# Altium PCB PCB1.PcbDoc
Units mm, origin at the board's own origin, x right, y up, seen from the top; angles counter-clockwise.
Board outline 89 x 51 mm, 2 copper layers (Top Layer, Bottom Layer); 26 components, 19 nets, 82 pads, 16 vias.
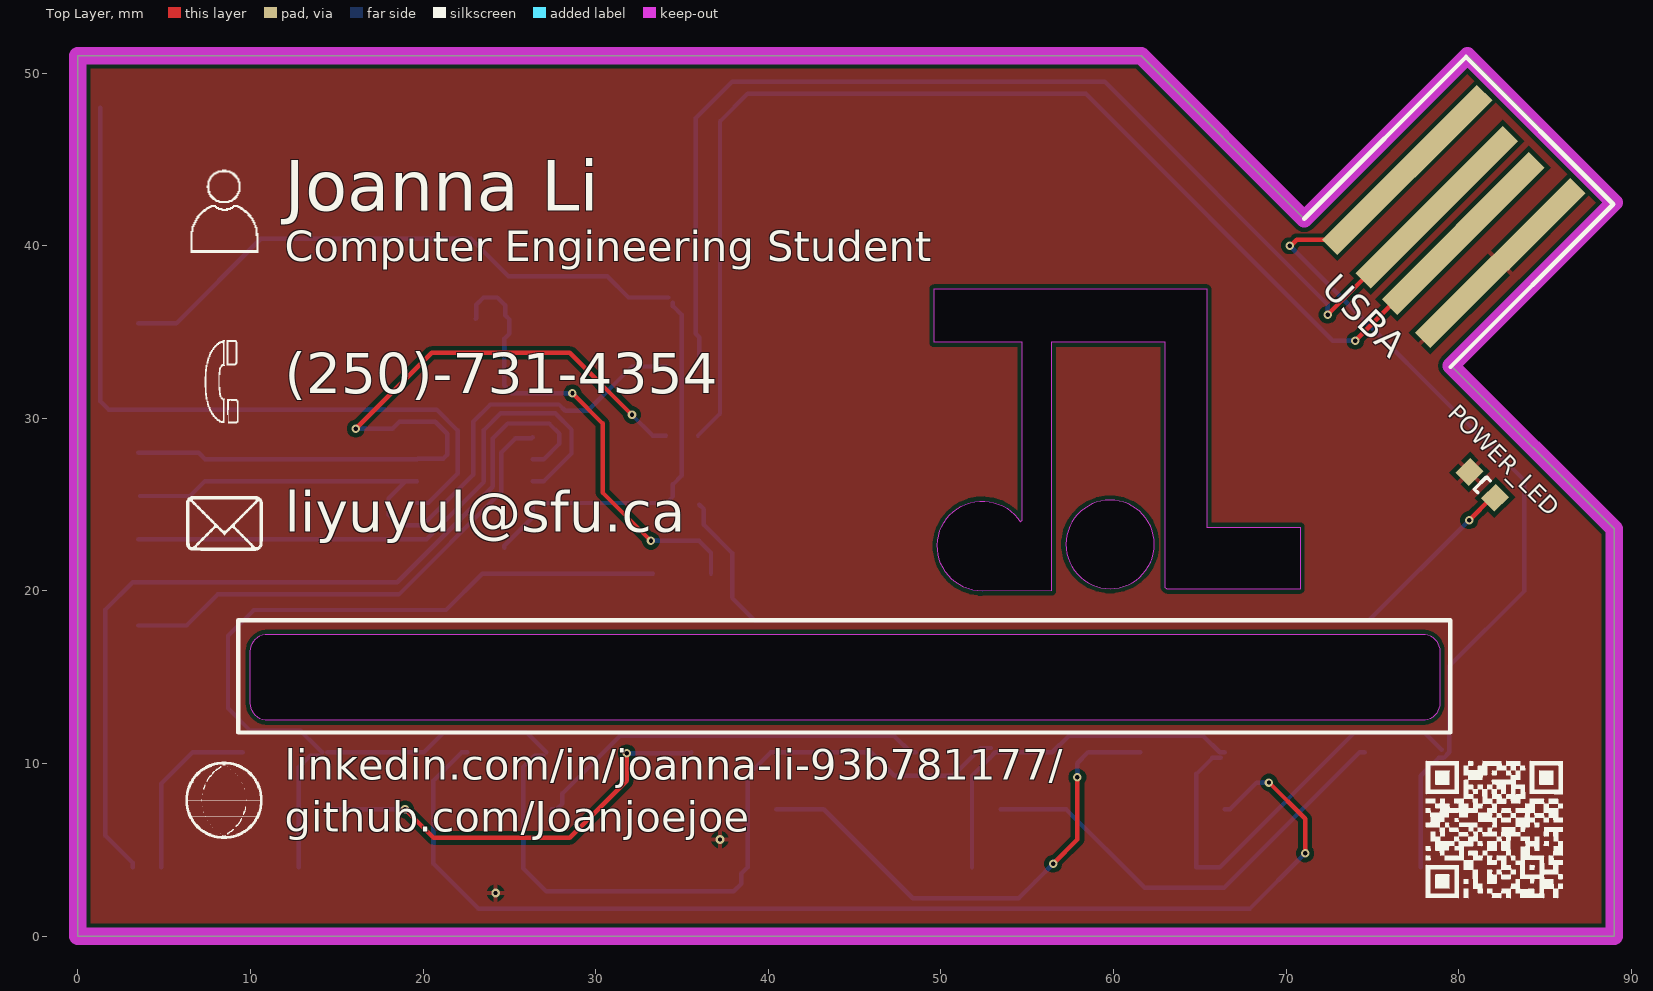
[diagram p0: Top Layer view]
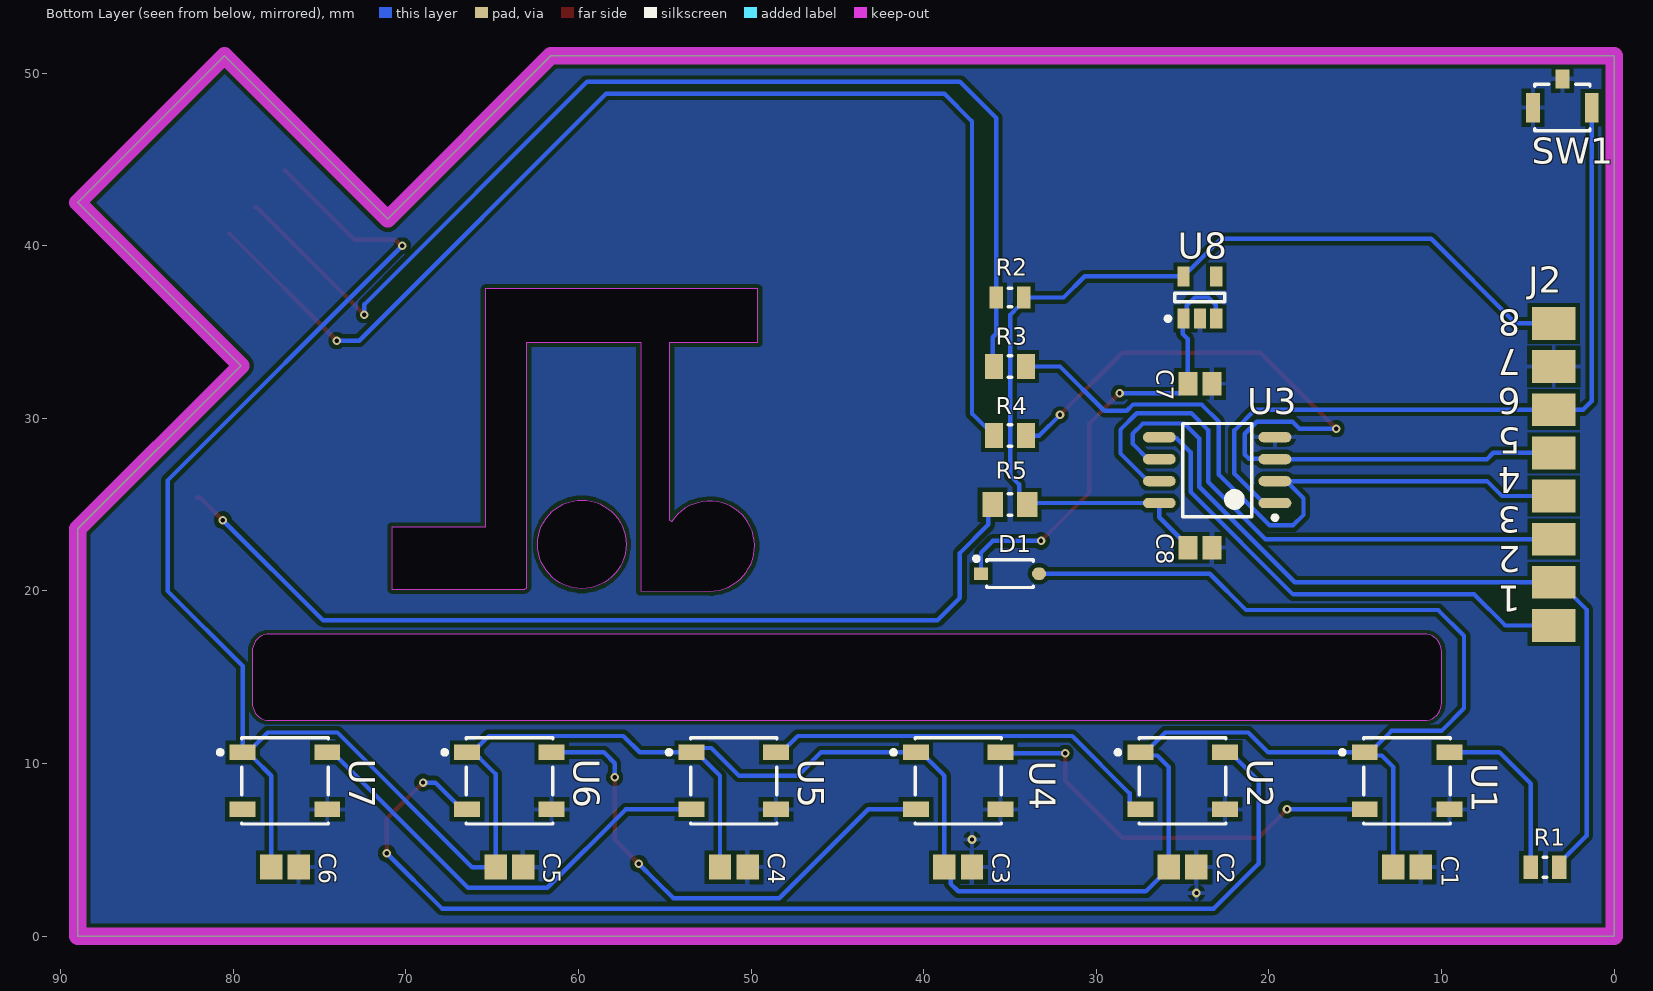
[diagram p1: Bottom Layer view, seen from below]

## Layer stack, top to bottom
Top Solder: solder mask 0.0102, Solder Resist, Dk 3.5
Top Layer: signal copper 0.0356
Dielectric 1: dielectric 0.32, FR-4, Dk 4.8
Bottom Layer: signal copper 0.0356
Bottom Solder: solder mask 0.0102, Solder Resist, Dk 3.5

## Board outline
0,0 89,0 89,23.6 79.55,33.05 89,42.5 80.5,51 71.05,41.55 61.6,51 0,51
cut-out: 57.239,22.7 ccw(c59.8,22.7) 59.8,20.139 ccw(c59.8,22.7) 62.361,22.7 ccw(c59.8,22.7) 59.8,25.261 ccw(c59.8,22.7)
cut-out: 54.6,24 54.7,24.1 54.7,34.4 49.6,34.4 49.6,37.5 65.4,37.5 65.4,23.7 70.8,23.7 70.8,20.1 63.1,20.1 63,20.2 63,34.4 56.4,34.4 56.4,20 52.4,19.992 cw(c52.4,22.6)
cut-out: 11,12.5 cw(c11,13.5) 10,13.5 10,16.5 cw(c11,16.5) 11,17.5 77.9,17.5 cw(c77.9,16.5) 78.9,16.5 78.9,13.5 cw(c77.9,13.5) 77.9,12.5

## Design rules (kind name [scope] priority, off if disabled: settings)
Clearance Clearance_1 [All] p1: gap=0.254 ignorepadtopadclearanceinfootprint=FALSE except(0: Arc-Hole Track-Hole SMDPad-Hole THPad-Hole Via-Hole Fill-Hole Poly-Hole Region-Hole Text-Hole; 0.15: SMDPad-SMDPad)
Clearance [All] p2: gap=0.254 ignorepadtopadclearanceinfootprint=FALSE except(0: Arc-Hole Track-Hole SMDPad-Hole THPad-Hole Via-Hole Fill-Hole Poly-Hole Region-Hole Text-Hole)
PolygonConnect [All] p1: connectstyle=Relief reliefconductorwidth=0.254 reliefentries=4 polygonreliefangle="90 Angle" airgapwidth=0.254
RoutingVias [All] p1: holewidth=0.711 width=1.27 viastyle="Through Hole" minholewidth=0.711 minwidth=1.27 maxholewidth=0.711 maxwidth=1.27
SolderMaskExpansion [All] p1: expansion=0.102 istentingtop=FALSE
Width [All] p1: maxlimit=0.254 minlimit=0.254 preferedwidth=0.254
30 further rules are at their usual default settings.

## Components (designator, comment, footprint, x,y, rotation, side; value= is the part's Value field where it differs from the comment)
C1 "0.1uf 10% 0805 16V" CAPC2013X140X50NL20T25 12,4 r0 bottom
C2 "0.1uf 10% 0805 16V" CAPC2013X140X50NL20T25 25,4 r0 bottom
C3 "0.1uf 10% 0805 16V" CAPC2013X140X50NL20T25 38,4 r0 bottom
C4 "0.1uf 10% 0805 16V" CAPC2013X140X50NL20T25 51,4 r0 bottom
C5 "0.1uf 10% 0805 16V" CAPC2013X140X50NL20T25 64,4 r0 bottom
C6 "0.1uf 10% 0805 16V" CAPC2013X140X50NL20T25 77,4 r0 bottom
C7 "10uf 16V 0805 10%" CAPC2013X145X50LL20T25 24,32 r0 bottom
C8 "10uf 16V 0805 10%" CAPC2013X145X50LL20T25 24,22.5 r0 bottom
D1 "MBR0520LT1G" FP-425-04-IPC_C 35,21 r180 bottom
J2 "pinpad" open_pad_8 3.5,25.5 r90 bottom
POWER_LED "CLEAR POWER" 0805_A 81.358,26.142 r315 top (schematic designator LED1)
R1 "470 1% 0805" RESC2013X50X30LL20T20 4,4 r0 bottom
R2 "1.5k 0805 1%" RESC2013X60X35LL10T20 35,37 r180 bottom
R3 "66.5 1% 0805" RESC2013X50X30NL20T20 35,33 r180 bottom
R4 "66.5 1% 0805" RESC2013X50X30NL20T20 35,29 r180 bottom
R5 "1K 0805 1%" RESC2013X60X35ML10T20 35,25 r0 bottom
SW1 "B3U-1100PM" FP-B3U-1100PM-MFG 3,48 r0 bottom
U1 "1655" ADA-RGB-1655_V 12,9 r180 bottom
U2 "1655" ADA-RGB-1655_V 25,9 r180 bottom
U3 "ATtiny85-20SUR" 8S2_L 23,27 r0 bottom
U4 "1655" ADA-RGB-1655_V 38,9 r180 bottom
U5 "1655" ADA-RGB-1655_V 51,9 r180 bottom
U6 "1655" ADA-RGB-1655_V 64,9 r180 bottom
U7 "1655" ADA-RGB-1655_V 77,9 r180 bottom
U8 "ADP150AUJZ-3.3-R7" ADI-UJ-5_M 24,37 r90 bottom
USBA "USB 12MM" "USB A" 75.306,37.294 r315 top (schematic designator J1)

## Footprints (in the part's own frame and the unit in brackets; to place one, negate y for a bottom-side part, rotate by r counter-clockwise, add the part's x,y. Pads: shape width x height; smd on the part's side, far side on the other; paste and mask are expansions set on the pad)
8S2_L [mm] "SOP, 8-Leads, Body 5.3x5.3mm, Pitch 1.27mm, IPC High Density"
  oval 1.9x0.6 smd: 1(-3.35,1.905) 2(-3.35,0.635) 3(-3.35,-0.635) 4(-3.35,-1.905) 5(3.35,-1.905) 6(3.35,-0.635) 7(3.35,0.635) 8(3.35,1.905)
  silkscreen extent -3.47,-2.7 2,2.88, body extent -2.7,-2.68 2.7,2.68, height 2.16
0805_A [mm] "Chip LED, 2-Leads, Body 2.0x1.3mm, IPC Medium Density"
  rect 1.1x1.2 smd: 1(-1.05,0) 2(1.05,0)
  silkscreen extent -0.15,-0.5 0.15,0.5, body extent -1,-0.63 1,0.62, height 0.68
ADA-RGB-1655_V [mm] "SMD, 4-Leads, Body 5x5mm"
  rect 1.5x0.9 smd: 1(-2.45,1.65) 2(-2.45,-1.65) 3(2.45,-1.65) 4(2.45,1.65)
  silkscreen extent -3.88,-2.5 2.5,2.5, body extent -2.7,-2.5 2.7,2.5, height 1.68
ADI-UJ-5_M [mm] "SOT23, 5-Leads, Body 2.9x1.6mm, Pitch 0.95mm, IPC Low Density"
  rect 1.15x0.7 smd: 1(-1.225,0.95) 2(-1.225,0) 3(-1.225,-0.95) 4(1.225,-0.95) 5(1.225,0.95)
  silkscreen extent -1.35,-1.45 0.25,1.98, body extent -0.8,-1.45 0.8,1.45, height 1
CAPC2013X140X50NL20T25 [mm] "Chip Capacitor, 2-Leads, Body 2.00x1.25mm, IPC Medium Density"
  rect 1.3x1.45 smd: 1(-0.8,0) 2(0.8,0)
  body extent -1.1,-0.72 1.1,0.72, height 1.4
CAPC2013X145X50LL20T25 [mm] "Chip Capacitor, 2-Leads, Body 2.00x1.25mm, IPC High Density"
  rect 1.1x1.35 smd: 1(-0.7,0) 2(0.7,0)
  body extent -1.1,-0.72 1.1,0.72, height 1.45
FP-425-04-IPC_C [mm]
  rect 0.808x0.742 smd paste+0 mask+0: 1(-1.68,0)
  rrect100% 0.808x0.742 smd paste+0 mask+0: 2(1.68,0)
  silkscreen extent -2.07,-0.8 1.35,1, body extent -1.84,-0.8 1.84,0.8, height 1.35
FP-B3U-1100PM-MFG [mm]
  rect 0.8x1.7 smd paste+0 mask+0: 1(1.7,0) 2(-1.7,0)
  rect 0.8x1.1 smd paste+0 mask+0: 3(0,-1.65)
  silkscreen extent -1.6,-1.35 1.6,1.35, body extent -2,-1.9 2,1.25, height 1.75
open_pad_8 [mm]
  rect 1.9x2.54 smd mask+0.05: 1(-7.5,0) 2(-5,0) 3(-2.5,0) 4(0,0) 5(2.5,0) 6(5,0) 7(7.5,0) 8(10,0)
RESC2013X50X30LL20T20 [mm] "Chip Resistor, 2-Leads, Body 2.00x1.25mm, IPC High Density"
  rect 0.85x1.35 smd: 1(-0.825,0) 2(0.825,0)
  silkscreen extent -0.1,-0.58 0.1,0.58, body extent -1.1,-0.72 1.1,0.72, height 0.5
RESC2013X50X30NL20T20 [mm] "Chip Resistor, 2-Leads, Body 2.00x1.25mm, IPC Medium Density"
  rect 1.05x1.45 smd: 1(-0.925,0) 2(0.925,0)
  silkscreen extent -0.1,-0.63 0.1,0.63, body extent -1.1,-0.72 1.1,0.72, height 0.5
RESC2013X60X35LL10T20 [mm]
  rect 0.8x1.25 smd: 1(-0.8,0) 2(0.8,0)
  silkscreen extent -0.1,-0.53 0.1,0.53, body extent -1.05,-0.67 1.05,0.67, height 0.6
RESC2013X60X35ML10T20 [mm] "Chip Resistor, 2-Leads, Body 2.1x1.35mm, IPC Low Density"
  rect 1.2x1.45 smd: 1(-1,0) 2(1,0)
  silkscreen extent -0.1,-0.63 0.1,0.63, body extent -1.05,-0.68 1.05,0.67, height 0.6
"USB A" [mil]
  rect 50x500 smd: 1(-150,245) 4(150,245)
  rect 50x475 smd: 2(-42.5,232.5) 3(42.5,232.5)
  silkscreen extent -238,-3 237,522

## Part data
C1 C2 C3 C4 C5 C6: library part CMP-2007-04629-1, Manufacturer="AVX Interconnect / Elco", Part Number=08055C104K4Z2A
C7 C8: library part CMP-1036-04746-2, Manufacturer=Kemet, Part Number=C0805C105K4PACTU
D1: library part CMP-1055-00425-2, "DIODE SCHOTTKY 20V 500MA SOD123", Average Rectified Current=500mA, Case/Package=SOD-123-2, Forward Voltage=385mV, Max Forward Surge Current (Ifsm)=5.5A, Max Operating Temperature=125°C, Max Repetitive Reverse Voltage (Vrrm)=20V, Max Reverse Leakage Current=250uA, Min Operating Temperature=-65°C, Package Quantity=3000, Contact Plating=Tin, Current Rating=500mA, Element Configuration=Single, Forward Current=500mA, Height=1.12mm, Lead Free="Lead Free", Length=2.69mm, Max Reverse Voltage (DC)=20V, Max Surge Current=5.5A, Number of Pins=2, Output Current=500mA, Packaging="Tape and Reel", Peak Non-Repetitive Surge Current=5.5A, Peak Reverse Current=250uA, Polarity=Standard, Radiation Hardening=No, REACH SVHC="No SVHC", Termination=SMD/SMT, Voltage Rating (DC)=20V, Width=1.6mm
POWER_LED: library part CMP-1426-00009-1, "SMD mono-color Chip LED, WL-SMCW, Bright Green", Color="Bright Green", Manufacturer="Wuerth Elektronik", PartNumber=150080VS75000, ComponentLink1Description="Manufacturer URL", ComponentLink1URL=http://www.we-online.com, ComponentLink2Description=Datasheet, ComponentLink2URL=http://katalog.we-online.com/led/datasheet/150080VS75000.pdf, PackageReference=0805_A
R1: library part CMP-2001-03932-1, Manufacturer="Vishay Dale", Part Number=CRCW0805470RFKEA
R2: library part CMP-1659-00010-2, "RES 1.50K OHM 1/8W 1% 0805 SMD", Manufacturer=Yageo, PartNumber=RC0805FR-071K5L, ComponentLink1Description=Datasheet, ComponentLink1URL=http://www.yageo.com/documents/recent/PYu-RC_Group_51_RoHS_L_04.pdf, PackageReference=0805
R3 R4: library part CMP-2001-04066-1, Manufacturer="Vishay Dale", Part Number=CRCW0805680RFKEA
R5: library part CMP-2100-03671-1, "Chip Resistor, 1 KOhm, +/- 1%, 125 mW, -55 to 155 degC, 0805 (2012 Metric), RoHS, Tape and Reel", Case Code (Imperial)=0805, Case Code (Metric)=2012, Manufacturer=Yageo, Max Operating Temperature=155degC, Max Power Dissipation=125mW, Min Operating Temperature=-55degC, Package Description="2-Pin Surface Mounted Device, Body 2 x 1.25 mm", Package Quantity=1, Resistance=1KOhm, Temperature Coefficient=100ppm/degreesC, Tolerance=1%, Voltage Rating=150V, Case/Package=0805, Composition=ThickFilm, Datasheet URL=http://www.yageo.com/NewPortal/yageodocoutput?fileName=/pdf/R-Chip/PYu-RC_Group_51_RoHS_L_5.pdf, Datasheet Version="Rev. 5, 10/2016", Depth=1.25mm, Height=0.024inch, Lead Free=LeadFree, Length=0.079inch, Manufacturer URL=http://www.yageo.com/, Military Standard=Not, Number of Pins=2, Number of Terminations=2, Package Reference=0805, Packaging=TapeandReel, Power Rating=125mW, REACH SVHC=Unknown, RoHSCompliant=true, Termination=SMD/SMT, Voltage Rating (DC)=150V, Width=0.049inch
SW1: library part CMP-08834-000028-1, "SWITCH TACTILE SPST-NO 0.05A 12V", Case/Package=SMD/SMT, Contact Resistance=100mR, Current Rating=50mA, Max Operating Temperature=70°C, Max Voltage Rating (DC)=12V, Min Operating Temperature=-25°C, Operating Force=1.5N, Package Quantity=1000, Ratings="Dust Proof", Actuator Length=0.4mm, Actuator Type=Standard, Connector Type=SMD/SMT, Electrical Life=200000Cycles, Illumination Type=Non-Illuminated, Mechanical Life=200000Cycles, Mount="Surface Mount", Orientation=Straight, Packaging="Tape and Reel", REACH SVHC="No SVHC", RoHS Compliant=Yes, Series=B3U, Switch Function=Off-Mom, Switch Travel=0.15mm, Termination=SMD/SMT, Throw Configuration=SPST, Voltage Rating (DC)=12V, Weight=0.022g
U1 U2 U4 U5 U6 U7: library part CMP-2000-05026-1, "Intelligent Control LED Integrated Light Source, 3.5 to 5.3 V, -25 to 80 degC, 4-Pin SMD, RoHS, Tape and Reel", Color=Red,Green,Blue(RGB), Manufacturer=Adafruit-Industries-LLC, Package Description="4-Pin Surface Mount Device, Body 5 x 5 mm", Category=Optoelectronics, Configuration=Discrete, Controller Type=-, Datasheet URL=http://datasheet.octopart.com/ADA1655-Adafruit-Industries-datasheet-32028139.pdf, Datasheet Version=May-13, Family=Addressable,Specialty, Interface=-, Manufacturer URL=https://www.adafruit.com/, Mounting Type=SurfaceMount, Number of LEDs=10, Package Reference=1655, Series=Neopixel, Size / Dimension=5.00mmLx5.00mmW, Utilized LED=WS2812(5050)
U3: library part CMP-0093-00351-1, "8-bit AVR Microcontroller, 20MHz, 2.7-5.5V, 8K Flash, 512 Bytes EEPROM, 512 Bytes SRAM, Industrial Grade (-40°C to 85°C), 8-Lead SOIC, Pb-Free, Reel", ComponentLink1Description="Manufacturer URL", ComponentLink1URL=http://www.atmel.com/, ComponentLink2Description="ATtiny25/45/85 Datasheet", ComponentLink2URL=http://www.atmel.com/dyn/resources/prod_documents/doc2586.pdf, ComponentLink3Description="ATtiny25/45/85 Summary", ComponentLink3URL=http://www.atmel.com/dyn/resources/prod_documents/2586S.pdf, DatasheetVersion="revN, Apr-2011", PackageDescription="8-Lead, 0.208\" Body, Plastic Small Outline Package (EIAJ)", PackageReference=8S2, PackageVersion="revF, Apr-2008"
U8: library part CMP-0786-00394-1, "Ultralow Noise, 150 mA CMOS Linear Regulator, 2.2 to 5.5 V Vin, 3.3 V Vout, Industrial, 5-pin SOT23 (UJ-5), Reel", Manufacturer="Analog Devices", Preset Vout Values (V)=3.3, Supply Current IGND @ Small Load=10uA, Code_JEDEC=MO-193-AB, ComponentLink1Description="Manufacturer URL", ComponentLink1URL=http://www.analog.com/en/index.html, ComponentLink2Description=Datasheet, ComponentLink2URL=http://www.analog.com/static/imported-files/data_sheets/ADP150.pdf, ComponentLink3Description="Package Specification", ComponentLink3URL=http:/www.analog.com/static/imported-files/packages/PKG_PDF/TSOT(UJ)/UJ_5.pdf, ComponentLink4Description="URL Link1", ComponentLink4URL="Product URL:http://www.analog.com/en/ADP150/productSearch.html", DatasheetVersion="Rev. A", Iout max=150mA, Mounting Technology="Surface Mount", PackageDescription="5-Pin Thin Small Outline Transistor Package, Body 2.9 x 1.6 mm, Pitch 0.95 mm", PackageReference=UJ-5, PackageVersion="100708-A, 10/2008", Packing=Reel, PartNumber=ADP150AUJZ-3.3-R7, Vin (max) (V)=5.5, Vin (min) (V)=2.2
USBA: library part USB

## Via types
v1: diameter 0.5, hole 0.25, Top Layer to Bottom Layer, 16 vias

## Nets (pads, with @x,y where several pads share a name; then routed paths per layer and width w, separated by ;. In a path a pad name is that pad's centre, name@x,y a point inside that pad or via, vN(x,y) a via of type N, cw(c..) or ccw(c..) an arc to the next point about the centre after c; other vN are vias at no path point)
+3V3: C8.2 J2.8 R2.2 R5.1 U3.8 U8.5 | length 57.1
  Bottom Layer w0.254: J2.8 5.7,35.5 10.6,40.4 22.775,40.4 U8.5 30.675,38.225 31.9,37 R2.2 ; C8.2 24.7,22.625 26.35,24.275 U3.8 R5.1@33.7,25.095 ; R5.1 34.473,25.473 34.473,26.173 34.981,26.681 34.981,33.883 34.975,33.889 34.975,36 34.473,36.502 R2.2@34.473,36.7
+5: C1.2 C2.2 C3.2 C4.2 C5.2 C6.2 D1.2 U1.1 U2.1 U4.1 U5.1 U6.1 U7.1 USBA.1 | length 199.9
  Top Layer w0.254: v1(70.2,40) 70.267,40 70.614,40.347 72.971,40.347 USBA.1
  Bottom Layer w0.254: C1.2 12.8,9.8 13.468,10.468 U1.1@13.968,10.468 ; U1.1@14.15,10.65 13.827,10.973 12.906,11.894 10.006,11.894 8.7,13.2 8.7,17.4 10.2,18.9 21.331,18.9 23.431,21 D1.2 ; U1.1 20.05,10.65 21.2,11.8 26,11.8 U2.1@27.15,10.65 ; U2.1@26.968,10.468 26.468,10.468 25.8,9.8 C2.2 25.8,3.925 27.125,2.6 38,2.6 38.443,3.043 38.443,3.643 C3.2 38.8,9.3 40.15,10.65 U4.1 45.95,10.65 47.3,9.3 50.7,9.3 52.3,10.9 U5.1@52.9,10.9 ; C4.2 51.8,9.292 52.827,10.319 52.827,10.327 53.15,10.65 56.45,10.65 57.4,11.6 65.2,11.6 66.15,10.65 U6.1 ; U6.1@66.2,10.327 65.727,10.327 64.8,9.4 C5.2 66.161,4 73.961,11.8 78,11.8 U7.1@79,10.8 ; v1(70.2,40) 83.8,26.4 83.8,20 79.45,15.65 U7.1 79.127,10.327 78.827,10.327 77.8,9.3 C6.2
GND: C1.1 C2.1 C3.1 C4.1 C5.1 C6.1 C7.1 C8.1 J2.7 POWER_LED.1 SW1.1 SW1.3 U1.3 U2.3 U3.4 U4.3 U5.3 U6.3 U7.3 U8.2 USBA.4
  other v1: 24.2,2.5 37.2,5.6
NetC7_2: C7.2 D1.1 U8.1 U8.3 | length 27.3
  Top Layer w0.254: v1(28.652,31.452) 30.4,29.704 30.4,25.7 v1(33.2,22.9)
  Bottom Layer w0.254: U8.3 23.082,35.807 23.082,36.582 23.5,37 24.3,37 24.76,36.54 24.76,35.965 25,35.725 25,34.9 24.7,34.6 C7.2 24.7,31.923 25.123,31.5 25.123,31.452 v1(28.652,31.452) ; v1(33.2,22.9) 36,22.9 36.68,22.22 D1.1
NetJ1_2: R2.1 R3.1 USBA.2 | length 66.8
  Top Layer w0.254: v1(72.4,36) 78.633,42.233 USBA.2
  Bottom Layer w0.254: R3.1 36,33.075 36,34.7 35.8,34.9 R2.1 35.8,37.225 35.8,47.4 37.9,49.5 59.5,49.5 72.4,36.6 v1(72.4,36)
NetJ1_3: R4.1 USBA.3 | length 70.9
  Top Layer w0.254: v1(74,34.5) 80.206,40.706 USBA.3
  Bottom Layer w0.254: R4.1 37.2,30.275 37.2,47.2 38.8,48.8 58.4,48.8 72.7,34.5 v1(74,34.5)
NetJ2_1: J2.1 U3.5 | length 28.7
  Bottom Layer w0.254: J2.1 6.3,18 8.1,19.8 18.6,19.8 24.54,25.74 24.54,28.04 25.339,28.839 26.284,28.839 U3.5
NetJ2_2: J2.2 R1.1 U3.6 | length 50.7
  Bottom Layer w0.254: R1.1 3.175,4.25 1.6,5.825 1.6,18.92 3.18,20.5 J2.2 18.5,20.5 24.032,26.032 24.032,28.832 24.9,29.7 27.3,29.7 27.9,29.1 27.9,28.535 27,27.635 U3.6
NetJ2_3: J2.3 U3.7 | length 34.6
  Bottom Layer w0.254: J2.3 20.2,23 23.524,26.324 23.524,29.324 24.492,30.292 27.657,30.292 28.6,29.349 28.6,27.965 27,26.365 U3.7
NetJ2_4: J2.4 R3.2 U3.2 | length 41
  Bottom Layer w0.254: J2.4@3.6,25.5 6.5,25.5 7.365,26.365 U3.2@19,26.365 ; U3.2 U3.2@19,26.365 ; R3.2 32.1,33 29.536,30.436 28.231,30.436 27.867,30.8 23.9,30.8 22.911,29.811 22.911,26.743 19.968,23.8 18.6,23.8 18,24.4 18,25.365 U3.2@19,26.365
NetJ2_5: J2.5 R4.2 U3.3 | length 46.9
  Top Layer w0.254: v1(16.1,29.4) 20.5,33.8 28.5,33.8 v1(32.1,30.2)
  Bottom Layer w0.254: J2.5 7,28 7.365,27.635 U3.3 19.684,27.669 21.169,27.669 21.4,27.9 21.4,29.1 20.7,29.8 18.633,29.8 18.233,29.4 v1(16.1,29.4) ; v1(32.1,30.2) 33.3,29 R4.2
NetJ2_6: J2.6 SW1.2 U3.1 | length 44
  Bottom Layer w0.254: SW1.2 1.3,31 1.8,30.5 J2.6 20.8,30.5 22,29.3 22,26.795 20.3,25.095 U3.1
NetLED1_2: POWER_LED.2 R5.2 | length 53.9
  Top Layer w0.254: v1(80.6,24.1) 81.9,25.4 POWER_LED.2
  Bottom Layer w0.254: R5.2 36.257,24.743 36.257,23.843 37.9,22.2 37.9,19.6 39.2,18.3 74.8,18.3 v1(80.6,24.1)
NetR1_2: R1.2 U1.4 | length 10.3
  Bottom Layer w0.254: R1.2 4.825,8.825 6.65,10.65 U1.4
NetU1_2: U1.2 U4.4 | length 24.8
  Top Layer w0.254: v1(18.95,7.35) 20.6,5.7 28.5,5.7 31.8,9 v1(31.8,10.6)
  Bottom Layer w0.254: U1.2 v1(18.95,7.35) ; v1(31.8,10.6) 35.5,10.6 U4.4
NetU2_2: U2.2 U5.4 | length 23.6
  Bottom Layer w0.254: U2.2 27.75,7.35 28.073,7.673 28.073,8.273 31.4,11.6 47.3,11.6 48.25,10.65 U5.4
NetU2_4: U2.4 U6.2 | length 68.5
  Top Layer w0.254: v1(69,8.9) 71.1,6.8 v1(71.1,4.8)
  Bottom Layer w0.254: U2.4 22.25,10.65 20.6,9 20.6,4.2 23.2,1.6 67.9,1.6 v1(71.1,4.8) ; U6.2 66.75,7.35 68.3,8.9 v1(69,8.9)
NetU4_2: U4.2 U6.4 | length 29.3
  Top Layer w0.254: v1(56.5,4.2) 57.9,5.6 v1(57.9,9.2)
  Bottom Layer w0.254: U4.2 43.212,7.35 48.362,2.2 54.5,2.2 55.5,3.2 v1(56.5,4.2) ; v1(57.9,9.2) 57.9,10.025 58.525,10.65 U6.4
NetU5_2: U5.2 U7.4 | length 26.2
  Bottom Layer w0.254: U5.2 57.25,7.35 61.8,2.8 66.4,2.8 74.25,10.65 U7.4
pads on no net: U7.2 U8.4

## Polygon pours and split planes (outlines as drawn)
GND on Top Layer "GND_TOP" (solid, remove dead copper, pour order 1): 0,0 89,0 89,23.6 79.6,33 79.5,33 89,42.5 80.5,51 71,41.5 61.5,51 0,51
GND on Bottom Layer "GND_BOM" (solid, remove dead copper, pour order 0): 0,0 89,0 89,23.6 79.6,33 79.5,33 89,42.5 80.5,51 71,41.5 61.5,51 0,51

## Keep-outs
Keep-Out Layer:
  the board outline again, w1

## Silkscreen, mask and mechanical layers (free items; w line width, h text height)
Top Overlay:
  drawing of 55 lines, arcs and shapes, not listed
  text "Joanna Li" at 12,41.065 h5
  text "Computer Engineering Student" at 12,38.508 h3
  text "(250)-731-4354" at 12,30.678 h4
  text "liyuyul@sfu.ca" at 12,22.641 h4
  text "linkedin.com/in/joanna-li-93b781177/" at 12,8.486 h3
  text "github.com/Joanjoejoe" at 12,5.486 h3
Bottom Overlay:
  text "1 / 2 / 3 / 4 / 5 / 6 / 7 / 8" at 5.4,36.3 h1.52 r180
Mechanical 1:
  lines w0.254: 10,13.5 ccw(c11,13.5) 11,12.5 77.9,12.5 ccw(c77.9,13.5) 78.9,13.5 78.9,16.5 ccw(c77.9,16.5) 77.9,17.5 11,17.5 ccw(c11,16.5) 10,16.5 10,13.5
Mechanical 13:
  circle w0.254: c59.8,22.7 r2.561
  lines w0.254: 49.6,34.4 54.7,34.4 54.7,24.1 54.6,24 ccw(c52.4,22.6) 52.4,19.992 56.392,19.992 56.4,20 56.4,34.4 63,34.4 63,20.2 63.1,20.1 70.8,20.1 70.8,23.7 65.4,23.7 65.4,37.5 49.6,37.5 49.6,34.4